# EAGLE board HX711 loadcell v1 (EAGLE 9.5.0)
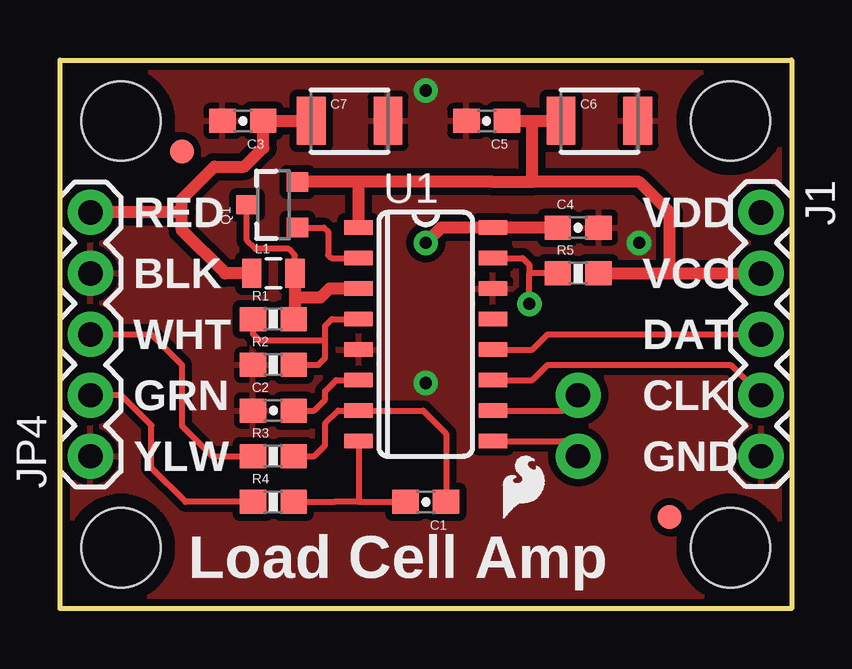
[diagram p0: board, top side]
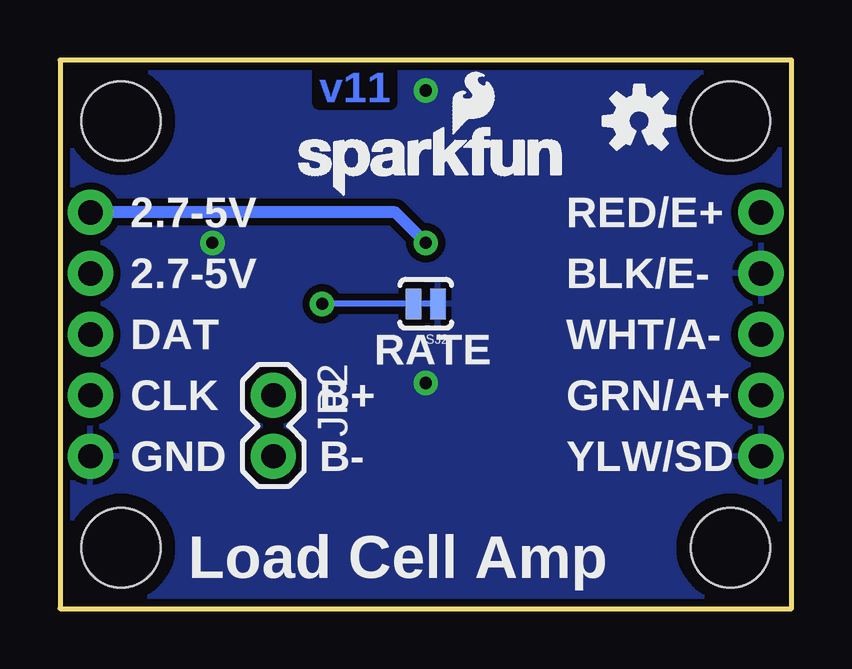
[diagram p1: board, bottom side, seen from below]

Size 30.48 x 22.86 mm. Coordinates in mm from the lower left corner, seen from the top.
Outline: 0,22.86 30.48,22.86 30.48,0 0,0 0,22.86
Copper layers (1*16): Top 0.035mm / dielectric 1.5mm / Bottom 0.035mm
Design rules "SparkFun-2-layer-STANDARD": minimum track width 10mil, minimum drill 20mil, track to track 10mil, track to pad 8mil, pad to pad 8mil, via to via 10mil, smd to smd 8mil, copper to edge 8mil, drill to drill 8mil, minimum pad ring 10mil, minimum via ring 10mil, stop-mask expansion 4mil, vias tented up to drill 25mil, thermal gap 10mil

## Footprints (pad centres in the part's own frame; a part is rotated, then mirrored left to right if it is on the bottom)
0603-CAP = smd 1.1 x 1: 1 -0.85,0; 2 0.85,0
1210 = smd 1.2 x 2: 1 -1.6,0; 2 1.6,0
FIDUCIAL-1X2 = smd 1 x 1: 1 0,0
1X05 = drill 1.016 pad 1.88: 1 0,0; 2 2.54,0; 3 5.08,0; 4 7.62,0; 5 10.16,0
1X02 = drill 1.016 pad 1.88: 1 0,0; 2 2.54,0
0805 = smd 0.8 x 1.2: 1 -0.9,0; 2 0.9,0
SOT23-3 = smd 0.8 x 0.9: 1 -0.95,-1; 2 0.95,-1; 3 0,1.1
0603-RES = smd 1.1 x 1: 1 -0.85,0; 2 0.85,0
PAD-JUMPER-2-NC_BY_TRACE_YES_SILK = smd 0.635 x 1.27: 1 -0.508,0; 2 0.508,0
STAND-OFF = hole 3.302: 0,0
SO16 = smd 0.6 x 1.2: 1 -4.445,-2.8; 2 -3.175,-2.8; 3 -1.905,-2.8; 4 -0.635,-2.8; 5 0.635,-2.8; 6 1.905,-2.8; 7 3.175,-2.8; 8 4.445,-2.8; 9 4.445,2.8; 10 3.175,2.8; 11 1.905,2.8; 12 0.635,2.8; 13 -0.635,2.8; 14 -1.905,2.8; 15 -3.175,2.8; 16 -4.445,2.8

## Placement (x,y rotation side)
C1  0.1uF  [0603-CAP]  15.24,4.45 180 top
C2  0.1uF  [0603-CAP]  8.89,8.26 0 top
C3  0.1uF  [0603-CAP]  7.62,20.32 180 top
C4  0.1uF  [0603-CAP]  21.59,15.88 0 top
C5  0.1uF  [0603-CAP]  17.78,20.32 180 top
C6  10uF  [1210]  22.48,20.32 0 top
C7  10uF  [1210]  12.06,20.32 0 top
FID1  FIDUCIAL1X2  [FIDUCIAL-1X2]  5.08,19.05 0 top
FID2  FIDUCIAL1X2  [FIDUCIAL-1X2]  25.4,3.81 0 top
FRAME1  FRAME-LETTER  [CREATIVE_COMMONS]  -5.08,-19.05 0 top  (outside the outline)
J1  [1X05]  29.21,16.51 270 top
JP2  [1X02]  21.59,8.89 270 bottom
JP4  [1X05]  1.27,6.35 90 top
L1  3.3uH  [0805]  8.89,13.97 0 top
LOGO1  SFE_LOGO_NAME_FLAME.1_INCH  [SFE_LOGO_NAME_FLAME_.1]  20.95,17.14 0 bottom
LOGO3  SFE_LOGO_FLAME.1_INCH  [SFE_LOGO_FLAME_.1]  18.16,3.43 0 top
Q1  MMBT4403  [SOT23-3]  8.89,16.83 90 top
R1  20k  [0603-RES]  8.89,12.06 0 top
R2  8.2K  [0603-RES]  8.89,10.16 0 top
R3  100  [0603-RES]  8.89,6.35 0 top
R4  100  [0603-RES]  8.89,4.45 0 top
R5  10K  [0603-RES]  21.59,13.97 0 top
SJ2  [PAD-JUMPER-2-NC_BY_TRACE_YES_SILK]  15.24,12.7 180 bottom
STANDOFF1  STAND-OFF  [STAND-OFF]  2.54,2.54 0 top
STANDOFF2  STAND-OFF  [STAND-OFF]  27.94,2.54 0 top
STANDOFF3  STAND-OFF  [STAND-OFF]  2.54,20.32 0 top
STANDOFF4  STAND-OFF  [STAND-OFF]  27.94,20.32 0 top
U1  HX711  [SO16]  15.24,11.43 270 top
U7  OSHW-LOGOS  [OSHW-LOGO-S]  6.35,20.32 0 bottom
U$1  REVISION  [REVISION]  6.99,-22.86 0 top  (outside the outline)

## Library data of the parts
C1-C5 = SparkFun-Capacitors; PROD_ID: CAP-08604
C6 C7 = SparkFun-Capacitors; PROD_ID: CAP-09824
FID1 FID2 FRAME1 LOGO1 LOGO3 U7 U$1 = SparkFun-Aesthetics
J1 JP2 JP4 = SparkFun-Connectors
L1 = SparkFun-Passives; PROD_ID: NDUC-13076
Q1 = SparkFun-DiscreteSemi; PROD_ID: TRANS-09245
R1 = SparkFun-Resistors; PROD_ID: RES-09383
R2 = SparkFun-Resistors; PROD_ID: RES-10646
R3 R4 = SparkFun-Resistors; PROD_ID: RES-07863
R5 = SparkFun-Resistors; PROD_ID: RES-00824
SJ2 = SparkFun-Passives
STANDOFF1-STANDOFF4 = SparkFun-Electromechanical
U1 = Testing; PROD_ID: IC-12445

## Nets
A+: JP4.2 R4.1
A-: JP4.3 R3.1
AVDD: C3.1 C7.1 JP4.5 L1.1
B+: JP2.1 U1.10
B-: JP2.2 U1.9
DAT: J1.3 U1.12
GND: C2.1 C3.2 C4.2 C5.2 C6.2 C7.2 J1.5 JP4.1 JP4.4 R2.1 SJ2.1 U1.5 U1.14
N$1: R5.1 SJ2.2 U1.15
N$2: C1.1 R3.2 U1.7
N$3: C1.2 R4.2 U1.8
N$4: Q1.1 U1.2
N$5: L1.2 Q1.3 R1.2 U1.3
N$6: R1.1 R2.2 U1.4
N$7: C2.2 U1.6
SCK: J1.4 U1.11
VCC: C5.1 C6.1 J1.2 Q1.2 R5.2 U1.1
VDD: C4.1 J1.1 U1.16

## Tracks (layer width: path | path; a pad name or v marks a point on that pad's centre or on a via)
A+
  Top 0.254: R4.1 5.23,4.45 3.81,5.87 3.81,7.63 2.55,8.89 JP4.2
A-
  Top 0.254: JP4.3 3.81,11.43 5.08,10.16 5.08,7.62 6.35,6.35 R3.1
AVDD
  Top 0.508: L1.1 6.88,13.97 5.08,15.77 5.08,16.51 | 5.08,16.51 JP4.5 | C7.1 C3.1 8.47,19.2 7.69,18.41 6.43,18.41 5.08,17.07 5.08,16.51
B+
  Top 0.254: U1.10 20.95,8.26 JP2.1
B-
  Top 0.254: U1.9 20.95,6.99 JP2.2
DAT
  Top 0.254: U1.12 19.68,10.79 20.32,11.43 J1.3
GND  (via drill 0.51)
  other vias: 15.24,9.4 24.13,15.24 15.24,21.59
  pour Top (isolate 0.305): 0,22.86 0,0 30.48,0 30.48,22.86
  pour Bottom (isolate 0.305): 0,22.86 0,0 30.48,0 30.48,22.86
N$1  (via drill 0.51)
  Top 0.254: U1.15 19.27,14.61 19.56,14.32 19.56,13.97 | R5.1 19.56,13.97 | v19.56,12.7 19.56,13.97
  Bottom 0.254: SJ2.2 v19.56,12.7
N$2
  Top 0.254: C1.1 16.09,7.29 15.13,8.26 U1.7 11.59,8.26 11.05,7.72 11.05,6.81 10.59,6.35 R3.2
N$3
  Top 0.254: R4.2 11.43,4.45 12.44,4.45 | 12.44,4.45 C1.2 | U1.8 12.44,4.45
N$4
  Top 0.254: Q1.1 10.99,15.88 11.18,15.7 11.18,14.73 11.3,14.61 U1.2
N$5
  Top 0.254: L1.2 9.79,14.72 9.53,14.99 8.15,14.99 7.79,15.35 Q1.3
  Top 0.508: L1.2 9.79,12.95 | 9.79,12.95 9.79,12.06 R1.2 | U1.3 11.23,13.34 10.85,12.95 9.79,12.95
N$6
  Top 0.254: R2.2 10.77,10.16 11.05,10.44 11.05,11.18 | 11.05,11.18 11.05,11.78 11.33,12.06 U1.4 | R1.1 8.04,11.45 8.31,11.18 11.05,11.18
N$7
  Top 0.254: C2.2 10.59,8.26 11.05,8.71 11.05,9.07 11.51,9.53 U1.6
SCK
  Top 0.254: U1.11 19.68,9.53 20.32,10.16 27.94,10.16 J1.4
VCC
  Top 0.508: 18.03,17.78 12.44,17.78 | 12.44,17.78 Q1.2 | 18.04,17.77 18.03,17.78 | 19.68,17.78 24.13,17.78 25.4,16.51 25.4,13.97 | 25.4,13.97 J1.2 | U1.1 12.44,17.78 | C5.1 19.68,20.32 | 19.68,20.32 C6.1 | R5.2 25.4,13.97 | 18.03,17.78 19.68,17.78 | 19.68,17.78 19.68,20.32
VDD  (via drill 0.51)
  Top 0.508: U1.16 C4.1 15.88,15.88 v15.24,15.24
  Bottom 0.508: v15.24,15.24 16.51,16.51 J1.1

## Text on the board
Bottom: v11
tPlace: RED | VDD | BLK | VCC | WHT | DAT | GRN | CLK | YLW | GND | Load Cell Amp
bPlace: RED/E+ | 2.7-5V | BLK/E- | 2.7-5V | WHT/A- | DAT | RATE | GRN/A+ | B+ | CLK | YLW/SD | B- | GND | Load Cell Amp
Measures: Units are in inches
tDocu: N. Seidle | Alex Wende